# EAGLE board boost module (EAGLE 9.5.2)
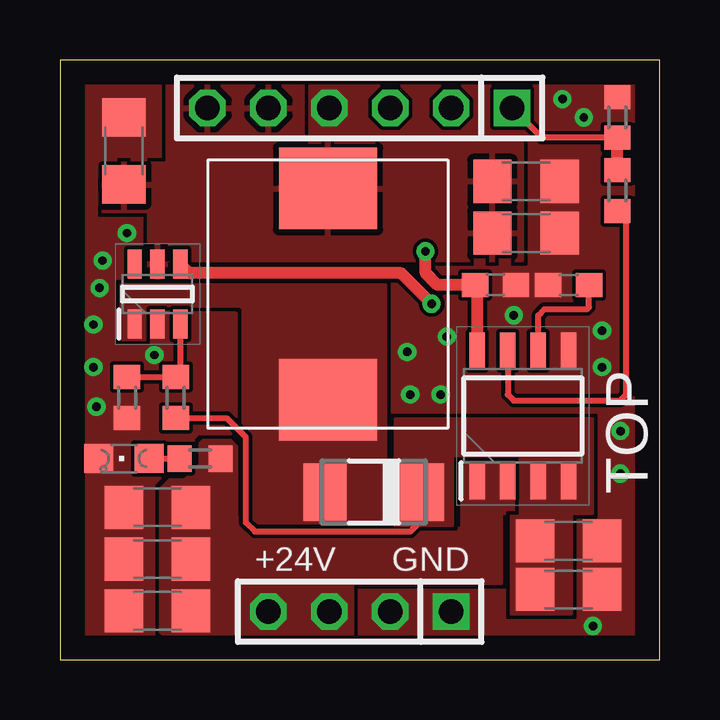
[diagram p0: board, top side]
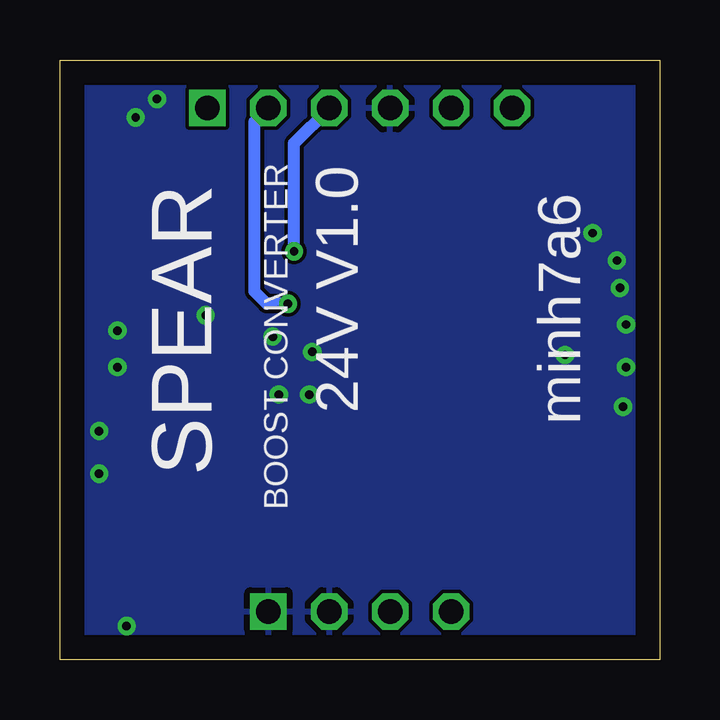
[diagram p1: board, bottom side, seen from below]

Size 25 x 25 mm. Coordinates in mm from the lower left corner, seen from the top.
Outline: 0,0 25,0 25,25 0,25 0,0
Copper layers (1*16): Top 0.035mm / dielectric 1.5mm / Bottom 0.035mm
Design rules "default *": minimum track width 6mil, minimum drill 0.35mm, track to track 6mil, track to pad 6mil, pad to pad 6mil, via to via 6mil, smd to smd 6mil, copper to edge 40mil, drill to drill 6mil, minimum pad ring 10mil, minimum via ring 8mil, stop-mask expansion 4mil, vias tented up to drill 20mil, thermal gap 10mil

## Footprints (pad centres in the part's own frame; a part is rotated, then mirrored left to right if it is on the bottom)
C1206 = smd 1.6 x 1.8: 1 -1.4,0; 2 1.4,0
C0603 = smd 1.1 x 1: 1 -0.85,0; 2 0.85,0
DO-214AC = smd 1.8 x 2.4: A 2.025,0; C -2.025,0
SOIC127P600X175-8N = smd 1.525 x 0.65: 1 -2.712,1.905; 2 -2.712,0.635; 3 -2.712,-0.635; 4 -2.712,-1.905; 5 2.712,-1.905; 6 2.712,-0.635; 7 2.712,0.635; 8 2.712,1.905
1X06 = drill 1.016 square: 1 -6.35,0 | drill 1.016 octagon: 2 -3.81,0; 3 -1.27,0; 4 1.27,0; 5 3.81,0; 6 6.35,0
1X04 = drill 1.016 square: 1 -3.81,0 | drill 1.016 octagon: 2 -1.27,0; 3 1.27,0; 4 3.81,0
CHIPLED_0805 = smd 1.2 x 1.2: A 0,-1.05; C 0,1.05
R0603 = smd 1 x 1.1: 1 -0.85,0; 2 0.85,0
SOT95P280X145-6N = smd 1.2 x 0.6: 1 -1.25,0.95; 2 -1.25,0; 3 -1.25,-0.95; 4 1.25,-0.95; 5 1.25,0; 6 1.25,0.95
22UH-1040-5A = smd 3.4 x 4.1: P$1 -4.4,0; P$2 4.4,0

## Placement (x,y rotation side)
C1  10uF  [C1206]  2.67,21.21 90 top
C2  10uF  [C1206]  19.43,17.78 0 top
C3  10uF  [C1206]  19.43,19.94 0 top
C4  10uF  [C1206]  21.21,4.95 0 top
C5  10uF  [C1206]  4.06,4.19 180 top
C6  10uF  [C1206]  4.06,2.03 180 top
C7  1nF  [C0603]  21.21,15.62 180 top
C8  100nF  [C0603]  18.16,15.62 0 top
C9  10uF  [C1206]  21.21,2.92 0 top
C10  10uF  [C1206]  4.06,6.35 180 top
D1  [DO-214AC]  13.08,6.99 180 top
IC1  ACS712ELCTR-20A-T  [SOIC127P600X175-8N]  19.3,10.16 90 top
JP1  [1X06]  12.5,23 180 top
JP3  [1X04]  12.5,2 180 top
LED1  [CHIPLED_0805]  2.67,8.38 90 top
R1  390k  [R0603]  4.83,10.92 270 top
R2  10k  [R0603]  2.79,10.92 90 top
R3  7.5k  [R0603]  23.24,19.56 90 top
R4  10k  [R0603]  23.24,22.61 90 top
R5  10k  [R0603]  5.84,8.38 0 top
U1  MT3608  [SOT95P280X145-6N]  4.06,15.24 90 top
U$1  22UH-1040-5A  [22UH-1040-5A]  11.18,15.24 270 top

## Library data of the parts
C1-C10 = rcl; SPICEPREFIX: C
D1 = diode
IC1 = LCSC; ALLIED_NUMBER: R1076682; ALLIED_PRICE-STOCK: http://www.alliedelec.com/allegro-microsystems-acs712elctr-20a-t/R1076682/; DESCRIPTION: ACS712ELCTR-20A-T, Hall Effect Sensor 5V 8-Pin SOIC, SOIC N; HEIGHT: 1.75mm; MANUFACTURER_NAME: Allegro Microsystems; MANUFACTURER_PART_NUMBER: ACS712ELCTR-20A-T; RS_PART_NUMBER: 6807135P; RS_PRICE-STOCK: http://uk.rs-online.com/web/p/products/6807135P
JP1 JP3 = pinhead
LED1 = led
R1-R5 = rcl; SPICEPREFIX: R
U1 = LCSC; DESCRIPTION: High Efficiency 1.2MHz 2A Step Up Converter; HEIGHT: 1.45mm; MANUFACTURER_NAME: Aerosemi; MANUFACTURER_PART_NUMBER: MT3608
U$1 = LCSC

## Nets
+5V: C8.1 IC1.8 JP1.3
AIOUT: JP1.1 R3.2 R4.1
EN: JP1.2 U1.4
GND: C1.2 C2.2 C3.2 C4.2 C5.2 C6.2 C7.2 C8.2 C9.2 C10.2 IC1.5 JP1.4 JP3.1 JP3.2 LED1.C R2.1 R4.2 U1.2
N$1: LED1.A R5.1
N$2: D1.A U1.1 U$1.P$2
N$4: C7.1 IC1.6
N$6: R1.1 R2.2 U1.3
SW: C4.1 C9.1 D1.C IC1.3 IC1.4 R1.2
VIN: C1.1 C2.1 C3.1 JP1.5 JP1.6 U1.5 U$1.P$1
VIOUT: IC1.7 R3.1
VOUT: C5.1 C6.1 C10.1 IC1.1 IC1.2 JP3.3 JP3.4 R5.2

## Tracks (layer width: path | path; a pad name or v marks a point on that pad's centre or on a via)
+5V  (via drill 0.35)
  Top 0.508: IC1.8 17.4,15.53 C8.1 15.75,15.62 15.24,16.13 v15.24,17.02
  Bottom 0.508: v15.24,17.02 15.24,21.53 JP1.3
AIOUT
  Top 0.254: R4.1 20.09,21.76 JP1.1
  Top 0.508: R3.2 R4.1
EN  (via drill 0.35)
  Top 0.508: U1.4 5.39,16.11 14.22,16.11 v15.49,14.84
  Bottom 0.508: v15.49,14.84 16.38,14.84 16.89,15.34 16.89,22.42 JP1.2
GND  (via drill 0.35)
  other vias: 20.95,23.37 21.84,22.61 22.61,13.72 15.88,11.05 18.92,14.35 22.61,12.19 23.37,9.53 23.37,7.75 1.52,10.54 1.4,12.19 3.94,12.7 1.65,15.49 1.78,16.64 2.79,17.78 22.23,1.4 16.13,13.46 14.48,12.83 1.4,13.97 14.61,11.05
  pour Bottom (rank 6): -0.76,25.65 -0.76,-0.38 25.78,-0.38 25.78,25.78 -0.76,25.78
  pour Top (rank 6, no thermals): -0.51,25.4 -0.51,-0.25 25.53,-0.25 25.53,25.27 25.4,25.4
N$1
  Top 0.254: LED1.A R5.1
N$2
  pour Top (no thermals): 2.54,13.34 3.56,13.34 3.56,14.73 7.49,14.73 7.62,14.61 7.62,5.97 8,5.59 12.7,5.59 13.46,5.59 13.59,5.71 13.59,15.62 2.54,15.62
N$4
  Top 0.254: IC1.6 19.94,14.35 20.19,14.61 21.97,14.61 22.06,14.69 C7.1
N$6
  Top 0.254: U1.3 5.01,11.96 R1.1 R2.2
SW
  Top 0.254: R1.2 6.95,10.07 7.75,9.27 7.75,5.71 8.13,5.33 14.61,5.33 15.11,5.83 D1.C
  pour Top (no thermals): 14.22,5.59 16.13,5.59 16.38,5.59 16.38,8.51 19.18,8.51 19.18,6.22 19.18,5.97 18.8,5.97 18.8,1.91 21.34,1.91 21.34,6.1 22.23,6.1 22.23,10.03 13.97,10.03 13.97,5.59
VIN
  pour Top (rank 2): 3.68,15.88 4.45,15.88 4.45,16.64 19.3,16.64 19.3,21.59 10.16,21.59 10.16,24.13 4.45,24.13 4.45,20.7 1.78,20.7 1.78,18.67 3.68,18.67
VIOUT
  Top 0.254: IC1.7 18.67,11.05 18.92,10.79 23.37,10.79 23.62,11.05 23.62,18.33 R3.1
VOUT
  pour Top (rank 2, no thermals): 4.45,0.89 12.19,0.89 12.19,3.17 18.41,3.17 18.41,6.1 19.05,6.1 19.05,8.26 16.76,8.26 16.76,5.46 7.87,5.46 7.49,5.84 7.37,5.97 7.37,8.89 7.11,9.14 5.97,9.14 5.84,9.02 5.84,8.13 5.21,7.49 4.57,7.49 4.19,7.11 4.19,5.84 4.19,1.14

## Text on the board
tPlace: TOP | +24V | GND
bPlace: 24V V1.0 | BOOST CONVERTER | SPEAR | minh7a6